# EAGLE board DTMF-Pic (EAGLE 9.6.2)
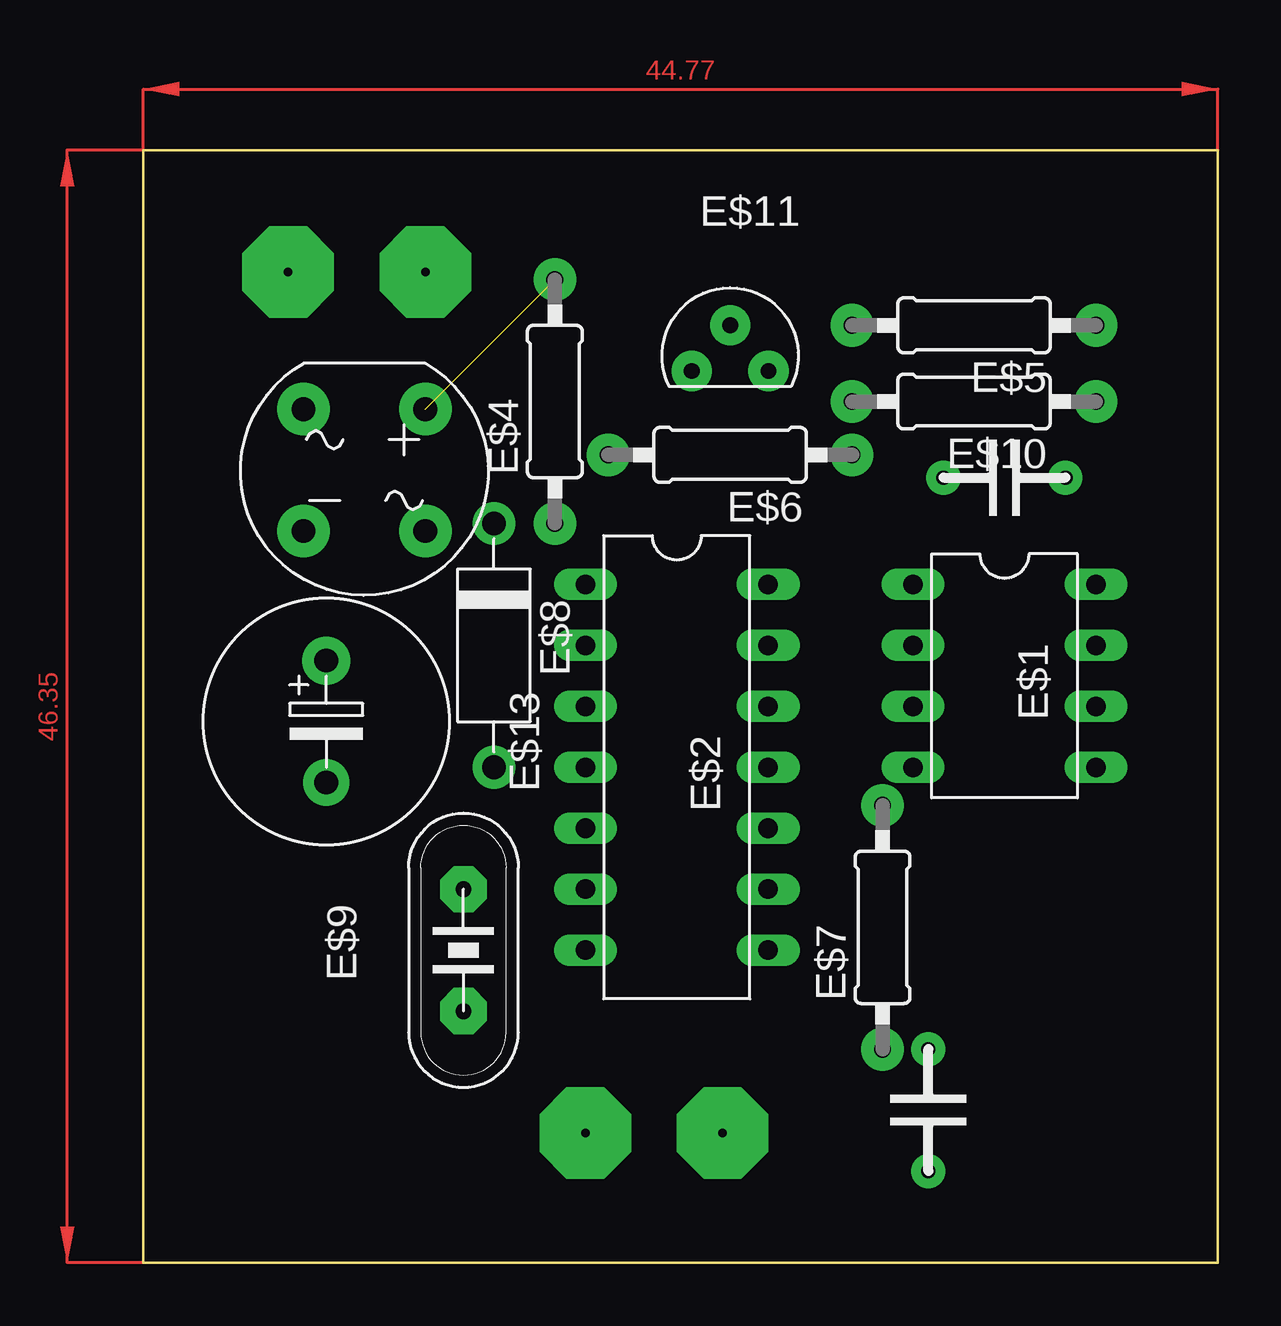
[diagram p0: board, top side]
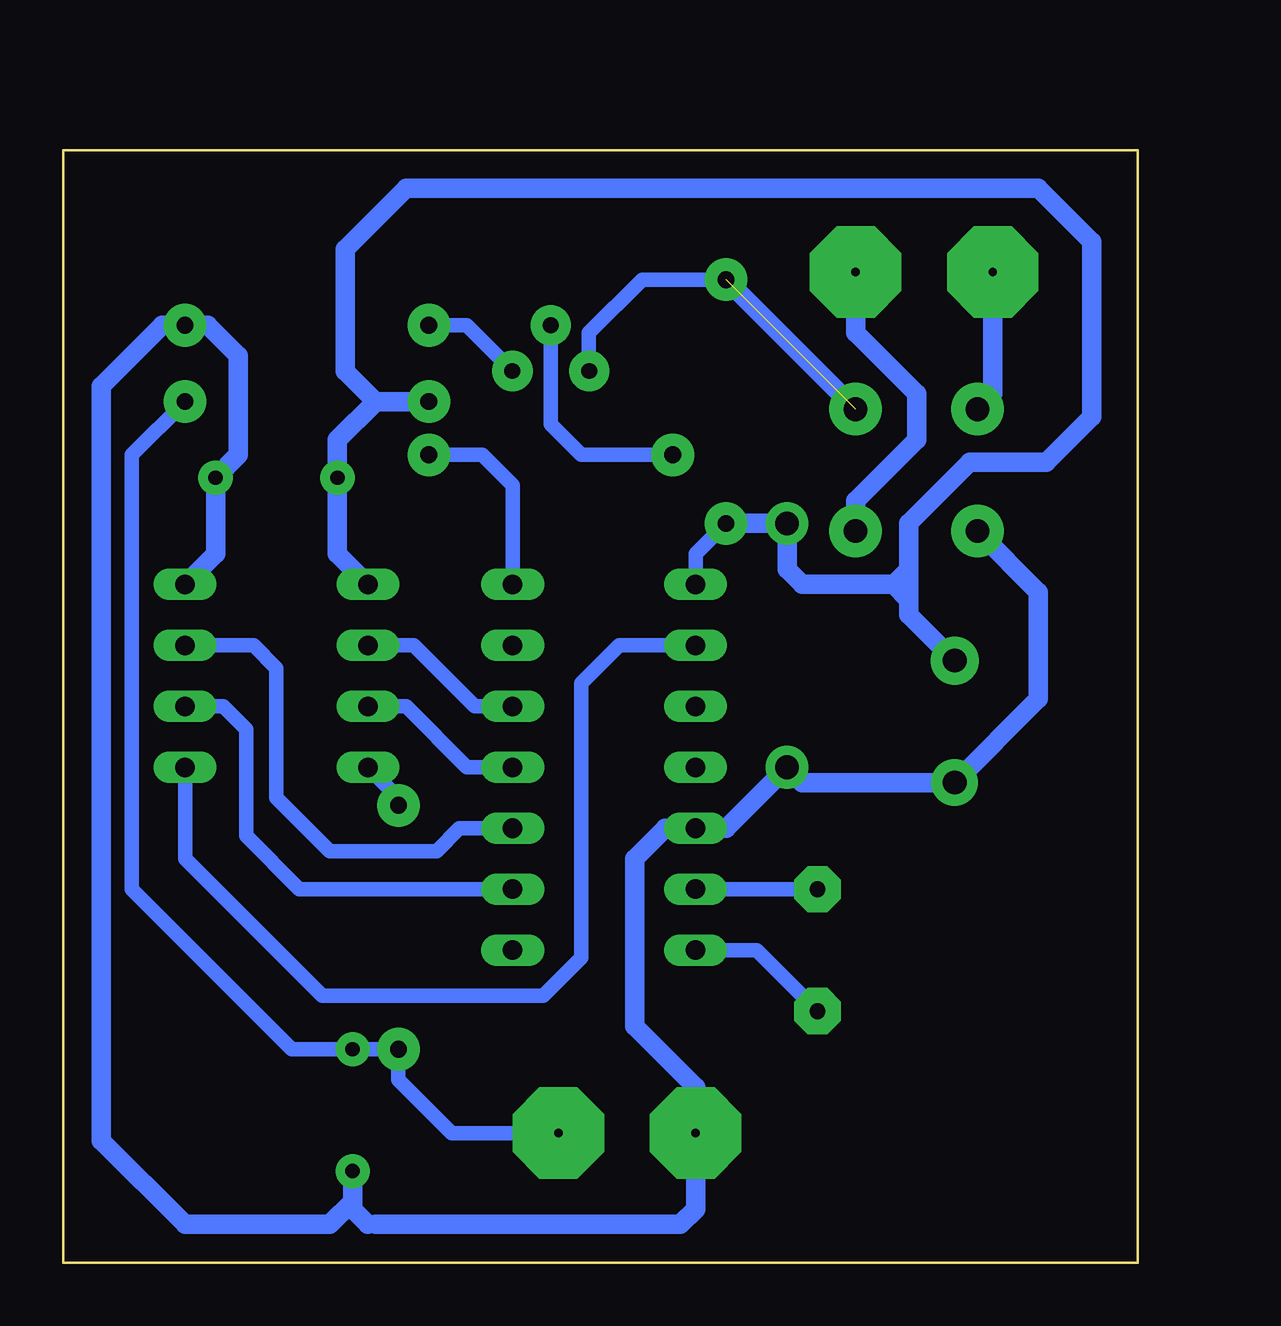
[diagram p1: board, bottom side, seen from below]

Size 44.77 x 46.35 mm. Coordinates in mm from the lower left corner, seen from the top.
Outline: 0,46.35 44.77,46.35 44.77,0 0,0 0,46.35
Copper layers (1*16): Top 0.035mm / dielectric 0.15mm / Bottom 0.035mm
Design rules "default": minimum track width 6mil, minimum drill 0.35mm, track to track 6mil, track to pad 6mil, pad to pad 6mil, via to via 6mil, smd to smd 6mil, copper to edge 40mil, drill to drill 6mil, minimum pad ring 10mil, minimum via ring 8mil, stop-mask expansion 4mil, vias tented up to drill 0mil, thermal gap 10mil

## Footprints (pad centres in the part's own frame; a part is rotated, then mirrored left to right if it is on the bottom)
DIL-8 = drill 0.813 pad 1.27 long: 1 0,0; 2 2.54,0; 3 5.08,0; 4 7.62,0; 5 7.62,7.62; 6 5.08,7.62; 7 2.54,7.62; 8 0,7.62
DIL-14 = drill 0.813 pad 1.27 long: 1 0,0; 2 2.54,0; 3 5.08,0; 4 7.62,0; 5 10.16,0; 6 12.7,0; 7 15.24,0; 8 15.24,7.62; 9 12.7,7.62; 10 10.16,7.62; 11 7.62,7.62; 12 5.08,7.62; 13 2.54,7.62; 14 0,7.62
PONT1A = drill 0.991 pad 2.184: 1 0,0; 2 0,5.08; 3 5.08,0; 4 5.08,5.08
RES-4 = drill 0.7 pad 1.778: 1 0,0; 2 10.16,0
DIO-4 = drill 0.991 pad 1.778: 1 -5.08,0; 2 5.08,0
QUARTZ = drill 0.66 pad 1.93 octagon: 1 -2.54,0; 2 2.54,0
TO-92 = drill 0.66 pad 1.676: 1 -1.6,-1.905; 2 0,0; 3 1.6,-1.905
CAP-2 = drill 0.6 pad 1.422: P$1 -2.54,0; P$2 2.54,0
CHIX2-4 = drill 0.991 pad 2.007: 1 -2.54,0 | drill 0.991 pad 1.93: 2 2.54,0

## Placement (x,y rotation side)
E$1  [DIL-8]  32.07,28.26 270 top
E$2  [DIL-14]  18.41,28.26 270 top
E$3  [PONT1A]  11.75,35.56 180 top
E$4  [RES-4]  17.14,30.8 90 top
E$5  [RES-4]  39.69,39.05 180 top
E$6  [RES-4]  29.53,33.66 180 top
E$7  10K  [RES-4]  30.8,8.89 90 top
E$8  [DIO-4]  14.6,25.72 90 top
E$9  [QUARTZ]  13.33,13.02 90 top
E$10  10K  [RES-4]  39.69,35.88 180 top
E$11  [TO-92]  24.45,39.05 0 top
E$12  0.1F  [CAP-2]  35.88,32.7 0 top
E$13  [CHIX2-4]  7.62,22.54 270 top
E$14  0.1µf  [CAP-2]  32.7,6.35 90 top

## Library data of the parts
E$1 E$12 E$14 = A-2011
E$2-E$11 E$13 = AA-2011

## Nets
S$1: E$2.7 E$9.1
S$2: E$3.2
S$3: E$3.3
S$4: E$7.1 E$10.1
S$5: E$2.6 E$9.2
S$6: E$1.1 E$2.1 E$4.1 E$8.2 E$10.2 E$12.P$1 E$13.1
S$7: E$6.2 E$11.2
S$8: E$1.2 E$2.12
S$9: E$1.5 E$2.2
S$10: E$2.14 E$6.1
S$11: E$1.3 E$2.11
S$12: E$1.7 E$2.10
S$13: E$1.6 E$2.9
S$15: E$1.4 E$7.2
S$16: E$3.1 E$4.2
S$17: E$5.2
S$18: E$5.1 E$12.P$2 E$14.P$1
S$20: E$2.5 E$3.4 E$8.1 E$13.2

## Tracks (layer width: path | path; a pad name or v marks a point on that pad's centre or on a via)
S$1
  Bottom 0.61: E$9.1 15.88,13.02 E$2.7
S$2  (via drill 0.35 pad 3.81)
  Bottom 0.813: v11.75,41.27 11.75,38.73 9.21,36.2 9.21,34.29 11.75,31.75 E$3.2
S$3  (via drill 0.35 pad 3.81)
  Bottom 0.813: E$3.3 6.03,36.2 v6.03,41.27
S$4  (via drill 0.35 pad 3.81)
  Bottom 0.61: v24.13,5.4 28.58,5.4 30.8,7.62 E$7.1 35.24,8.89 41.91,15.56 41.91,33.66 E$10.1
S$5
  Bottom 0.61: E$9.2 E$2.6
S$6
  Bottom 0.61: E$2.1 18.42,29.53 E$4.1
  Bottom 0.813: E$4.1 E$8.2 14.6,28.89 13.97,28.26 10.16,28.26 | 10.16,28.26 9.53,28.26 | 9.53,28.26 9.53,27.62 | 9.53,27.62 9.53,26.99 E$13.1 | 9.53,28.26 9.53,28.89 | 9.53,28.89 9.53,30.8 6.99,33.34 3.81,33.34 1.91,35.24 1.91,42.55 4.13,44.77 30.48,44.77 33.02,42.23 33.02,37.15 31.75,35.88 | 31.75,35.88 E$10.2 | E$1.1 33.34,29.53 E$12.P$1 33.34,34.29 31.75,35.88 | 9.53,28.89 10.16,28.26 | 10.16,28.26 9.53,27.62
S$7
  Bottom 0.61: E$6.2 23.18,33.66 24.45,34.92 E$11.2
S$8
  Bottom 0.61: E$2.12 27.62,23.18 30.16,25.72 E$1.2
S$9
  Bottom 0.61: E$2.2 21.59,25.72 23.18,24.13 23.18,12.7 24.76,11.11 33.97,11.11 39.69,16.83 E$1.5
S$10
  Bottom 0.61: E$2.14 26.03,32.38 27.31,33.66 E$6.1
S$11
  Bottom 0.61: E$2.11 27.94,20.64 30.48,23.18 E$1.3
S$12
  Bottom 0.61: E$2.10 28.26,18.1 29.21,17.14 33.65,17.14 35.88,19.37 35.88,24.77 36.83,25.72 E$1.7
S$13
  Bottom 0.61: E$1.6 38.1,23.18 37.15,22.23 37.15,17.78 34.93,15.56 E$2.9
S$15
  Bottom 0.61: E$7.2 30.8,19.37 E$1.4
S$16  (1 unrouted)
  Bottom 0.61: E$4.2 20.64,40.96 22.86,38.73 22.86,37.15
  Bottom 0.813: E$3.1 E$4.2
S$17
  Bottom 0.61: 26.03,37.15 27.94,39.05 E$5.2
S$18
  Bottom 0.813: 39.69,28.26 38.42,29.53 E$12.P$2 37.46,33.66 37.46,37.78 38.74,39.05 E$5.1 | 32.07,1.59 32.7,2.22 32.7,2.54 | 32.7,2.54 E$14.P$1 | 32.7,2.54 33.65,1.59 39.69,1.59 43.18,5.08 43.18,36.51 40.64,39.05 E$5.1 | E$5.1 39.69,39.37
S$20  (via drill 0.35 pad 3.81)
  Bottom 0.813: E$3.4 4.13,27.94 4.13,23.5 E$13.2 13.97,20 E$8.1 17.15,18.1 E$2.5 19.69,18.1 20.96,16.83 20.96,9.84 18.42,7.3 v18.42,5.4 18.42,2.22 19.05,1.59 31.75,1.59
(copper drawn outside any net)
  shapes: Top area x2

## Text on the board
tValues: A B | 2N2222 | 150 | 1K | 12K | 10µf | Z5.1V | TP5088 | 3.57954 Mhz | C D | A blanc 13 / B blanc/bleu IV / C rouge I / D rouge/blanc II